# EAGLE board MainBoard (EAGLE 6.3)
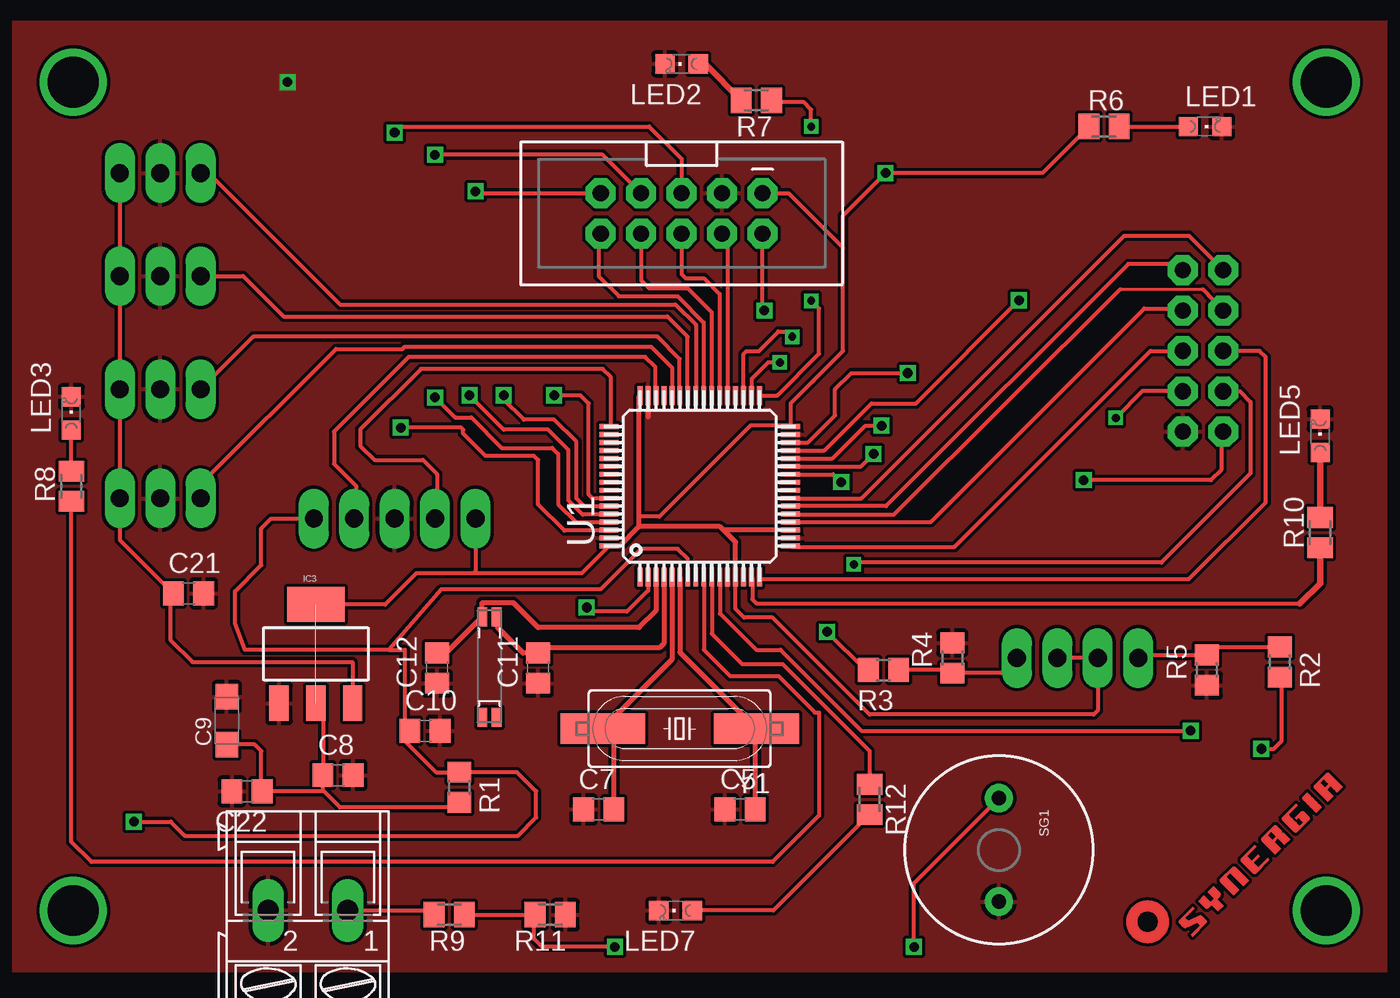
[diagram p0: board, top side]
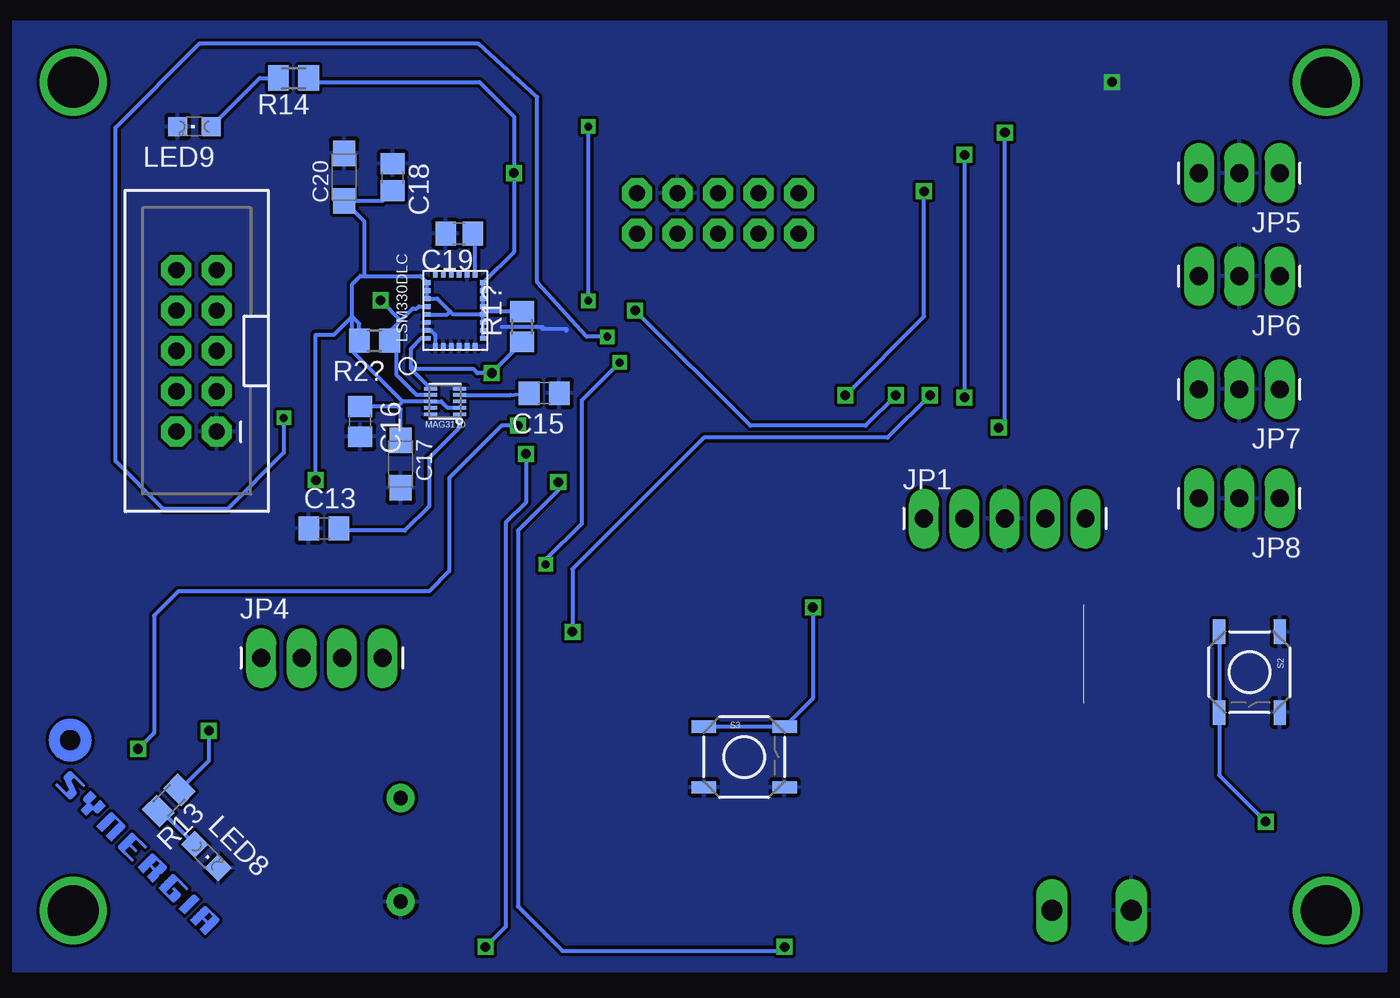
[diagram p1: board, bottom side, seen from below]

No outline drawn. Coordinates in mm, seen from the top.
Copper layers (1*16): Top 0.035mm / dielectric 1.5mm / Bottom 0.035mm
Design rules "default": minimum track width 10mil, minimum drill 24mil, track to track 8mil, track to pad 8mil, pad to pad 8mil, via to via 8mil, smd to smd 8mil, copper to edge 40mil, drill to drill 8mil, minimum pad ring 10mil, minimum via ring 8mil, stop-mask expansion 4mil, vias tented up to drill 0mil, thermal gap 10mil

## Footprints (pad centres in the part's own frame; a part is rotated, then mirrored left to right if it is on the bottom)
C0805 = smd 1.3 x 1.5: 1 -0.95,0; 2 0.95,0
SMC_A = smd 1.6 x 1.4: + -1.5,0; - 1.5,0
C0805' = smd 1.3 x 1.5: 1 -0.85,0; 2 0.85,0
SOT223 = smd 1.219 x 2.235: 1 -2.311,-3.099; 2 0,-3.099; 3 2.311,-3.099 | smd 3.6 x 2.2: 4 0,3.099
1X05_LONGPADS = drill 1.118 pad 1.88 long: 1 0,0; 2 2.54,0; 3 5.08,0; 4 7.62,0; 5 10.16,0
2X5-SHROUDED = drill 1.016 pad 1.88 octagon: 1 -1.27,5.08; 2 1.27,5.08; 3 -1.27,2.54; 4 1.27,2.54; 5 -1.27,0; 6 1.27,0; 7 -1.27,-2.54; 8 1.27,-2.54; 9 -1.27,-5.08; 10 1.27,-5.08
1X04_LONGPADS = drill 1.118 pad 1.88 long: 1 0,0; 2 2.54,0; 3 5.08,0; 4 7.62,0
1X03_LONGPADS = drill 1.118 pad 1.88 long: 1 0,0; 2 2.54,0; 3 5.08,0
CHIPLED_0805 = smd 1.2 x 1.2: A 0,-1.05; C 0,1.05
LGA_4X5X1P1_28L = smd 0.4 x 0.3: P1 -2.263,1.25; P2 -2.263,0.75; P3 -2.263,0.25; P4 -2.263,-0.25; P5 -2.263,-0.75; P6 -2.263,-1.25; P15 2.263,-1.25; P16 2.263,-0.75; P17 2.263,-0.25; P18 2.263,0.25; P19 2.263,0.75; P20 2.263,1.25 | smd 0.3 x 0.4: P7 -1.75,-1.762; P8 -1.25,-1.762; P9 -0.75,-1.762; P10 -0.25,-1.762; P11 0.25,-1.762; P12 0.75,-1.762; P13 1.25,-1.762; P14 1.75,-1.762; P21 1.75,1.762; P22 1.25,1.762; P23 0.75,1.762; P24 0.25,1.762; P25 -0.25,1.762; P26 -0.75,1.762; P27 -1.25,1.762; P28 -1.75,1.762
DFN-10 = smd 0.8 x 0.22: 1 -0.91,0.8; 2 -0.91,0.4; 3 -0.91,0; 4 -0.91,-0.4; 5 -0.91,-0.8; 6 0.91,-0.8; 7 0.91,-0.4; 8 0.91,0; 9 0.91,0.4; 10 0.91,0.8
R0805 = smd 1.3 x 1.5: 1 -0.95,0; 2 0.95,0
M0805 = smd 1.3 x 1.6: 1 -0.95,0; 2 0.95,0
TACTILE_SWITCH_SMD = smd 1.524 x 0.762: 1 -2.54,1.905; 2 2.54,1.905; 3 -2.54,-1.905; 4 2.54,-1.905
BUZZER-12MM = drill 0.9 pad 1.778: + 3.25,0; - -3.25,0
TQFP64 = smd 1.2 x 0.3: 1 -5.7,3.75; 2 -5.7,3.25; 3 -5.7,2.75; 4 -5.7,2.25; 5 -5.7,1.75; 6 -5.7,1.25; 7 -5.7,0.75; 8 -5.7,0.25; 9 -5.7,-0.25; 10 -5.7,-0.75; 11 -5.7,-1.25; 12 -5.7,-1.75; 13 -5.7,-2.25; 14 -5.7,-2.75; 15 -5.7,-3.25; 16 -5.7,-3.75; 33 5.7,-3.75; 34 5.7,-3.25; 35 5.7,-2.75; 36 5.7,-2.25; 37 5.7,-1.75; 38 5.7,-1.25; 39 5.7,-0.75; 40 5.7,-0.25; 41 5.7,0.25; 42 5.7,0.75; 43 5.7,1.25; 44 5.7,1.75; 45 5.7,2.25; 46 5.7,2.75; 47 5.7,3.25; 48 5.7,3.75 | smd 0.3 x 1.2: 17 -3.75,-5.7; 18 -3.25,-5.7; 19 -2.75,-5.7; 20 -2.25,-5.7; 21 -1.75,-5.7; 22 -1.25,-5.7; 23 -0.75,-5.7; 24 -0.25,-5.7; 25 0.25,-5.7; 26 0.75,-5.7; 27 1.25,-5.7; 28 1.75,-5.7; 29 2.25,-5.7; 30 2.75,-5.7; 31 3.25,-5.7; 32 3.75,-5.7; 49 3.75,5.7; 50 3.25,5.7; 51 2.75,5.7; 52 2.25,5.7; 53 1.75,5.7; 54 1.25,5.7; 55 0.75,5.7; 56 0.25,5.7; 57 -0.25,5.7; 58 -0.75,5.7; 59 -1.25,5.7; 60 -1.75,5.7; 61 -2.25,5.7; 62 -2.75,5.7; 63 -3.25,5.7; 64 -3.75,5.7
AK300/2 = drill 1.321 long: 1 -2.515,0; 2 2.489,0
HC49UP = smd 5.334 x 1.93: 1 -4.826,0; 2 4.826,0
CRYSTAL-32KHZ-SMD_EPSON_MC146 = smd 1.2 x 0.6: NC1 6.9,1.2; NC2 6.9,0.3; P$1 0.6,0.3; P$2 0.6,1.2

## Placement (x,y rotation side)
C5  22p  [C0805]  26.67,12.7 0 top
C7  22p  [C0805]  17.78,12.7 0 top
C8  100n  [C0805]  1.4,14.86 0 top
C9  1u  [SMC_A]  -5.59,18.29 90 top
C10  100n  [C0805]  6.86,17.65 0 top
C11  10p  [C0805]  13.97,21.59 90 top
C12  10p  [C0805]  7.62,21.59 90 top
C13  100n  [C0805]  47.75,30.35 0 bottom
C15  100n  [C0805]  33.91,38.86 180 bottom
C16  100n  [C0805]  45.47,37.08 270 bottom
C17  1uF  [SMC_A]  42.93,34.42 270 bottom
C18  100n  [C0805']  43.43,52.45 270 bottom
C19  10n  [C0805']  39.24,48.9 180 bottom
C20  10u  [SMC_A]  46.48,52.45 90 bottom
C21  [C0805]  -8,26.29 0 top
C22  [C0805]  -4.32,13.84 180 top
IC3  [SOT223]  0,22.48 0 top
JP1  [1X05_LONGPADS]  10.03,30.99 0 bottom
JP2  M05X2SHD  [2X5-SHROUDED]  22.99,50.16 270 top
JP3  M05X2SHD  [2X5-SHROUDED]  55.75,41.53 180 bottom
JP4  [1X04_LONGPADS]  51.69,22.23 0 bottom
JP5  [1X03_LONGPADS]  -12.32,52.7 180 bottom
JP6  [1X03_LONGPADS]  -12.32,46.23 180 bottom
JP7  [1X03_LONGPADS]  -12.32,39.12 180 bottom
JP8  [1X03_LONGPADS]  -12.32,32.26 180 bottom
LED1  [CHIPLED_0805]  55.88,55.63 270 top
LED2  [CHIPLED_0805]  22.99,59.56 90 top
LED3  [CHIPLED_0805]  -15.37,37.59 0 top
LED5  [CHIPLED_0805]  63.12,36.2 0 top
LED7  [CHIPLED_0805]  22.61,6.35 90 top
LED8  [CHIPLED_0805]  55.13,9.77 225 bottom
LED9  [CHIPLED_0805]  55.88,55.63 90 bottom
LSM330DLC  LSM330DLC  [LGA_4X5X1P1_28L]  39.5,44.07 90 bottom
MAG3110  MAG3110  [DFN-10]  40.13,38.35 180 bottom
R1  10k  [R0805]  9.02,14.1 270 top
R1?  4.7k  [R0805]  35.31,43.05 90 bottom
R2  510  [R0805]  60.58,21.97 270 top
R2?  4.7k  [R0805]  44.58,42.16 180 bottom
R3  510  [R0805]  35.69,21.46 180 top
R4  10k  [R0805]  40.01,22.23 90 top
R5  10k  [R0805]  56.01,21.46 90 top
R6  [M0805]  49.53,55.63 0 top
R7  [M0805]  27.69,57.28 180 top
R8  [M0805]  -15.37,33.02 90 top
R9  [M0805]  8.38,6.1 180 top
R10  [M0805]  63.12,30.1 90 top
R11  [M0805]  14.73,6.1 180 top
R12  [M0805]  34.8,13.34 270 top
R13  [M0805]  57.49,13.27 225 bottom
R14  [M0805]  49.66,58.67 180 bottom
S2  [TACTILE_SWITCH_SMD]  -10.41,21.34 270 bottom
S3  [TACTILE_SWITCH_SMD]  21.34,16 0 bottom
SG1  BUZZERPTH  [BUZZER-12MM]  42.93,10.16 270 top
U1  STM32F10XRXT6  [TQFP64]  24.13,33.02 90 top
U$1  [SYNERGIA_16MM]  53.22,2.82 45 top
U$2  [SYNERGIA_16MM]  66.52,16.12 315 bottom
X1  [AK300/2]  -0.51,6.35 180 top
Y1  8MHz  [HC49UP]  22.86,17.78 180 top
Y2  32.768kHz  [CRYSTAL-32KHZ-SMD_EPSON_MC146]  10.16,25.4 270 top

## Library data of the parts
C5 C7-C13 C15-C17 C20-C22 R1 R1? R2 R2? R3-R5 = rcl
C18 C19 R6-R14 = resistor
IC3 = SparkFun-PowerIC
JP1-JP8 = SparkFun-Connectors
LED1-LED3 LED5 LED7-LED9 = led
LSM330DLC = sensors-akc_zyr
MAG3110 = sparkfun-sensors (2)
S2 S3 = SparkFun-Electromechanical; PROD_ID: SWCH-08247
SG1 = SparkFun-Electromechanical
U1 = stm32
U$1 U$2 = synergia_logo
X1 = con-ptr500; OC_FARNELL: unknown; OC_NEWARK: unknown
Y1 Y2 = SparkFun-FreqCtrl

## Nets
3.3V: C8.1 C9.+ C16.1 C17.+ C18.2 C20.+ C22.1 IC3.2 IC3.4 JP1.1 JP2.1 JP3.2 JP4.2 JP4.3 LSM330DLC.P7 LSM330DLC.P8 LSM330DLC.P9 LSM330DLC.P10 LSM330DLC.P11 LSM330DLC.P12 LSM330DLC.P13 LSM330DLC.P14 LSM330DLC.P21 LSM330DLC.P22 LSM330DLC.P23 LSM330DLC.P25 MAG3110.2 MAG3110.8 R1.2 R1?.2 R2?.2 R6.1 R14.1 U1.13 U1.19 U1.32 U1.48 U1.64
5V: C21.1 IC3.3 JP5.1 JP6.1 JP7.1 JP8.1
A1: JP2.7 U1.61
A2: JP2.5 U1.62
A3: JP2.9 U1.58
A4: JP2.2 U1.59
A5: JP2.8 U1.39
A6: JP2.10 U1.40
A7: JP2.4 U1.37
A8: JP2.6 U1.38
BOOT0: R3.2 U1.60
BOOT1: R2.2 U1.28
BUTTON: S3.1 S3.2 U1.2
BUZZ: SG1.- U1.27
GND: C5.1 C7.1 C8.2 C9.- C10.2 C11.1 C12.1 C13.1 C15.1 C16.2 C17.- C18.1 C19.2 C20.- C21.2 C22.2 IC3.1 JP1.3 JP2.3 JP3.1 JP5.2 JP6.2 JP7.2 JP8.2 LED1.C LED2.C LED3.C LED5.C LED7.C LED8.C LED9.C LSM330DLC.P1 LSM330DLC.P2 LSM330DLC.P3 LSM330DLC.P4 LSM330DLC.P5 LSM330DLC.P6 LSM330DLC.P16 LSM330DLC.P26 LSM330DLC.P27 MAG3110.5 MAG3110.10 R4.2 R5.1 R11.1 S2.1 S2.2 S3.3 S3.4 SG1.+ U1.12 U1.18 U1.31 U1.47 U1.63 X1.2
INT_ACC: LSM330DLC.P20
INT_GYRO: LSM330DLC.P18
INT_MAG: MAG3110.9
L1: R7.1 U1.33
L2: R8.1 U1.9
L4: R10.1 U1.15
L6: R12.1 U1.10
L7: R13.1 U1.11
LIPO: R9.1 R11.2 U1.26
MISO: JP3.9 U1.22
MOSI: JP3.10 U1.23
N$1: JP4.1 R2.1 R5.2
N$2: JP4.4 R3.1 R4.1
N$3: C15.2 MAG3110.4
N$4: C13.2 MAG3110.1
N$5: C19.1 LSM330DLC.P15
N$6: LED1.A R6.2
N$7: LED2.A R7.2
N$8: LED3.A R8.2
N$10: LED5.A R10.2
N$12: LED7.A R12.2
N$13: LED8.A R13.2
N$14: LED9.A R14.2
N$19: R9.2 X1.1
NRST: C10.1 JP1.5 R1.1 S2.3 S2.4 U1.7
OSC32_IN: C12.2 U1.3 Y2.P$1
OSC32_OUT: C11.2 U1.4 Y2.P$2
OSC_IN: C7.2 U1.5 Y1.2
OSC_OUT: C5.2 U1.6 Y1.1
OUT1: JP3.3 U1.35
OUT2: JP3.4 U1.34
REG1: JP5.3 U1.41
REG2: JP6.3 U1.42
REG3: JP7.3 U1.43
REG4: JP8.3 U1.44
RX: JP3.5 U1.17
SCK: JP3.8 U1.21
SCL: LSM330DLC.P24 MAG3110.7 R2?.1 U1.29
SDA: LSM330DLC.P28 MAG3110.6 R1?.1 U1.30
SS: JP3.7 U1.20
SWCLK: JP1.2 U1.49
SWDIO: JP1.4 U1.46
TX: JP3.6 U1.16
V_BATT: U1.1

## Tracks (layer width: path | path; a pad name or v marks a point on that pad's centre or on a via)
3.3V  (via drill 0.6)  (1 unrouted)
  Top 0.254: 20.32,31.11 21.59,31.11 27.3,36.83 29.77,36.83 U1.32 29.84,36.78 29.84,38.23 31.24,39.62 31.25,39.62 33.14,41.52 33.14,48.01 | JP2.1 29.72,51.44 33.14,48.01 | 9.91,27.56 6.35,27.56 4.37,25.58 IC3.4 | 9.91,27.56 16.72,27.56 U1.64 | 0,19.18 0.13,19.3 0.08,19.3 IC3.2 0.45,18.93 C8.1 0.45,13.9 | 9.14,13.02 R1.2 8.7,12.83 1.52,12.83 0.45,13.9 | 0.45,13.9 0.39,13.84 C22.1 -3.43,13.9 -3.43,16.38 -3.83,16.79 C9.+ | JP4.3 JP4.2 49.15,18.92 48.9,18.67 34.8,18.67 28.7,24.77 26.92,24.77 26.38,25.31 U1.13 | R6.1 45.66,52.7 v35.81,52.7 33.14,50.03 33.14,48.01 | JP3.2 56.9,36.32 56.9,34.04 56.26,33.4 v48.26,33.4 | JP1.1 10.03,27.69 9.91,27.56
  Top 0.305: U1.64 19.11,29.27 20.32,30.48 | 20.32,30.48 20.32,31.11 20.32,38.66 U1.48 | U1.13 26.38,29.5 25.61,30.27 | 20.32,30.48 25.4,30.48 25.61,30.27 | U1.19 25.61,30.27
  Bottom 0.254: 39.81,44.01 40.63,44.82 LSM330DLC.P23 LSM330DLC.P22 LSM330DLC.P21 41.67,46.23 45.21,46.23 | 39.81,44.01 39.62,43.81 39.62,43.82 LSM330DLC.P10 | LSM330DLC.P25 40,43.82 39.81,44.01 | MAG3110.2 39.24,37.97 40.01,37.97 40.39,38.35 MAG3110.8 42.8,38.35 | LSM330DLC.P7 LSM330DLC.P8 LSM330DLC.P9 LSM330DLC.P10 | LSM330DLC.P10 LSM330DLC.P11 | LSM330DLC.P11 LSM330DLC.P12 LSM330DLC.P13 LSM330DLC.P14 35.81,47.74 v35.81,52.7 35.81,56.26 37.97,58.42 48.45,58.42 R14.1 | 42.8,38.35 45.97,41.53 45.97,43.69 | 45.97,43.69 45.97,45.72 45.47,46.23 45.21,46.23 | R1?.2 37.42,44 LSM330DLC.P11 | R2?.2 45.53,43.24 45.97,43.69 | v48.26,33.4 48.26,42.55 47.12,42.55 45.97,43.69 | C18.2 44.08,50.95 C20.+ 45.21,49.68 45.21,46.23 | 42.8,38.35 43.12,38.03 | 43.12,38.03 C16.1 | C17.+ 42.93,37.84 43.12,38.03
5V
  Top 0.254: IC3.3 2.31,21.95 2.29,21.97 -7.75,21.97 -9.14,23.37 -9.14,26.1 C21.1 -12.32,29.66 JP8.1 JP7.1 JP6.1 -12.32,46.48 JP5.1
A1  (via drill 0.6)
  Top 0.254: JP2.7 18.03,53.85 v7.49,53.85 | v7.49,38.61 8.76,37.34 9.78,37.34 11.68,35.43 14.86,35.43 15.24,35.05 15.24,31.88 16.35,30.77 U1.61
  Bottom 0.254: v7.49,53.85 v7.49,38.61
A2  (via drill 0.6)
  Top 0.254: U1.62 18.39,30.23 15.62,30.23 13.97,31.88 13.97,34.67 13.72,34.92 10.67,34.92 9.27,36.32 9.27,36.58 9.14,36.7 v5.33,36.7 | v4.95,55.24 5.33,55.63 20.95,55.63 22.99,53.59 JP2.5
  Bottom 0.254: v5.33,36.7 4.95,37.08 v4.95,55.24
A3  (via drill 0.6)
  Top 0.254: U1.58 18.42,32.26 17.4,32.26 17.14,32.51 17.14,38.23 16.64,38.73 v14.99,38.73 | v10.03,51.56 10.16,51.44 JP2.9
  Bottom 0.254: v14.99,38.73 10.03,43.69 v10.03,51.56
A4  (via drill 0.6)
  Top 0.254: U1.59 18.41,31.75 16.89,31.75 16.38,32.26 16.38,35.81 14.99,37.21 13.08,37.21 11.81,38.48 v11.81,38.73 | v28.19,44.07 28.07,44.2 JP2.2
  Bottom 0.254: v11.81,38.73 13.72,36.83 20.95,36.83 v28.19,44.07
A5
  Top 0.254: JP2.8 20.32,48.77 20.45,48.64 20.45,45.97 20.95,45.47 23.37,45.47 24.88,43.95 U1.39
A6
  Top 0.254: JP2.10 17.78,48.77 17.78,46.23 19.05,44.96 22.73,44.96 24.38,43.31 U1.40
A7
  Top 0.254: JP2.4 25.88,48.54 U1.37
A8
  Top 0.254: JP2.6 22.99,46.35 23.24,46.1 24.38,46.1 25.38,45.1 U1.38
BOOT0  (via drill 0.6)
  Top 0.254: U1.60 18.4,31.24 16.76,31.24 15.88,32.13 15.88,35.31 14.61,36.58 11.81,36.58 v9.65,38.73 | v32.13,23.88 34.54,21.46 R3.2
  Bottom 0.254: v9.65,38.73 12.32,36.07 23.88,36.07 32.13,27.81 v32.13,23.88
BOOT1  (via drill 0.6)
  Top 0.254: U1.28 32.48,34.77 34.54,36.83 v35.56,36.83 | v59.44,16.51 60.2,16.51 60.71,17.02 60.71,20.89 R2.2
  Bottom 0.254: v35.56,36.83 36.58,36.83 39.88,33.53 39.88,27.69 41.15,26.42 56.9,26.42 58.42,24.89 58.42,17.53 v59.44,16.51
BUTTON  (via drill 0.6)
  Top 0.254: U1.2 20.88,26.47 19.56,25.15 17.27,25.15 v17.02,25.4
  Bottom 0.254: v17.02,25.4 17.02,19.68 S3.2 S3.1
BUZZ  (via drill 0.6)
  Top 0.254: U1.27 34.27,34.27 v35.05,35.05 | v37.59,4.06 37.59,8.08 SG1.-
  Bottom 0.254: v35.05,35.05 35.05,32 36.32,30.73 36.32,5.33 v37.59,4.06
GND  (via drill 0.6)
  Top 0.305: U1.47 20.88,37.39
  Bottom 0.254: LSM330DLC.P27 41.04,42.82 40.77,42.55 40.77,41.83 LSM330DLC.P1 | 36.58,43.05 34.04,43.05 34.04,42.93 32.51,42.93 32.51,42.8
  other vias: -1.78,58.42
  pour Top: -19.05,62.23 -19.05,2.54 67.31,2.54 67.31,62.23
  pour Bottom: -19.05,62.23 67.31,62.23 67.31,2.54 -19.05,2.54
L1  (via drill 0.5)
  Top 0.254: U1.33 29,38.72 31.63,41.35 31.63,44.19 v31.14,44.68 | v31.14,55.63 31.14,56.7 30.68,57.15 28.76,57.15 R7.1
  Bottom 0.254: v31.14,44.68 v31.14,55.63
L2
  Top 0.254: U1.9 24.38,22.73 26.04,21.08 29.08,21.08 31.37,18.8 31.62,18.8 31.62,12.32 28.7,9.4 -14.1,9.4 -15.37,10.67 R8.1
L4
  Top 0.254: U1.15 27.43,27.27 27.43,25.91 27.69,25.65 61.85,25.65
  Top 0.406: R10.1 63.12,26.92 61.85,25.65
L6
  Top 0.254: U1.10 24.89,27.31 24.89,23.75 26.8,21.84 29.34,21.84 34.8,16.38 R12.1
L7  (via drill 0.6)
  Top 0.254: U1.11 25.4,27.3 25.4,25.02 27.69,22.73 29.21,22.73 34.29,17.65 v54.99,17.65
  Bottom 0.254: v54.99,17.65 54.99,15.77 R13.1
LIPO  (via drill 0.6)
  Top 0.254: R9.1 R11.2 13.72,6.03 13.72,4.57 14.22,4.06 v18.8,4.06 | U1.26 32.52,33.77 v33.02,33.27
  Bottom 0.254: v33.02,33.27 33.02,32.77 35.56,30.23 35.56,6.6 32.77,3.81 19.05,3.81 v18.8,4.06
MISO
  Top 0.254: JP3.9 54.1,46.99 51.05,46.99 35.83,31.77 U1.22
MOSI
  Top 0.254: JP3.10 54.86,48.77 50.8,48.77 34.29,32.26 29.84,32.26 U1.23
N$1
  Top 0.254: JP4.1 51.88,22.41 R5.2 56.52,22.92 R2.1
N$2
  Top 0.254: JP4.4 43.12,21.27 R4.1 39.82,21.46 R3.1
N$3
  Bottom 0.254: MAG3110.4 36.03,38.75 C15.2
N$4
  Bottom 0.254: MAG3110.1 39.22,36.72 41.15,34.8 41.15,31.75 42.67,30.23 46.67,30.23 C13.2
N$5
  Bottom 0.254: LSM330DLC.P15 38.25,48.75 C19.1
N$6
  Top 0.254: R6.2 LED1.A
N$7
  Top 0.406: LED2.A 24.45,59.56 R7.2
N$8
  Top 0.254: R8.2 LED3.A
N$9  (via drill 3.2)
  other vias: -15.24,58.42
N$10
  Top 0.406: LED5.A R10.2
N$11  (via drill 3.2)
  other vias: 63.5,58.42
N$12
  Top 0.254: R12.2 28.76,6.35 LED7.A
N$13
  Bottom 0.254: R13.2 57.96,12.6 LED8.A
N$14
  Bottom 0.254: LED9.A 51.78,58.67 R14.2
N$15  (via drill 3.2)
  other vias: 63.5,6.35
N$16  (via drill 3.2)
  other vias: -15.24,6.35
N$19
  Top 0.254: X1.1 7.18,6.35 R9.2
NRST  (via drill 0.6)
  Top 0.254: U1.7 23.38,28.44 22.73,29.08 20.45,29.08 17.91,26.54 7.87,26.54 4.57,22.73 | 4.57,22.73 -4.45,22.73 -5.08,24.38 -5.08,26.42 -3.43,28.07 -3.43,30.35 -2.79,30.99 JP1.5 | 4.57,22.73 5.59,22.73 5.59,17.4 | 5.59,17.4 5.59,17.02 7.56,15.05 R1.1 12.64,15.05 13.84,13.84 13.84,12.19 12.7,11.05 -8.23,11.05 -9.12,11.94 v-11.43,11.94 | C10.1 5.65,17.4 5.59,17.4
  Bottom 0.254: S2.4 S2.3 -8.51,14.86 v-11.43,11.94
OSC32_IN
  Top 0.305: U1.3 21.38,25.19 20.32,24.13 13.97,24.13 12.4,25.7 10.46,25.7 Y2.P$1 8.2,22.54 C12.2
OSC32_OUT
  Top 0.305: U1.4 21.88,23.15 21.59,22.86 14.29,22.86 C11.2 13.02,22.54 11.43,24.13 11.43,24.73 Y2.P$2
OSC_IN
  Top 0.305: U1.5 22.38,22.13 Y1.2 18.73,17.08 C7.2
OSC_OUT
  Top 0.305: U1.6 22.88,22.59 Y1.1 27.62,17.71 C5.2
OUT1  (via drill 0.5)
  Top 0.254: JP3.3 51.94,38.99 v50.27,37.31 | U1.35 26.88,41.33 27.06,41.51 27.84,41.51 29.08,42.74 29.61,42.74 v29.94,42.42
  Bottom 0.254: v50.27,37.31 50.27,35.13 53.81,31.59 57.84,31.59 60.84,34.59 60.84,55.56 55.58,60.83 38.03,60.83 34.34,57.48 34.34,45.86 31.24,42.42 v29.94,42.42
OUT2  (via drill 0.5)
  Top 0.254: JP3.4 58.08,38.99 58.74,38.32 58.74,33.82 53.14,28.22 33.92,28.22 v33.81,28.11 | v29.16,40.8 28.42,40.8 27.39,39.76 U1.34
  Bottom 0.254: v33.81,28.11 33.81,28.4 31.54,30.68 31.54,38.43 v29.16,40.8
REG1
  Top 0.254: U1.41 23.88,43.18 22.61,44.45 1.52,44.45 -6.6,52.58 -7.11,52.58 JP5.3
REG2
  Top 0.254: U1.42 23.37,38.73 23.37,42.42 22.1,43.69 -2.03,43.69 -4.57,46.23 JP6.3
REG3
  Top 0.254: U1.43 22.86,38.74 22.86,41.02 21.46,42.42 -3.94,42.42 JP7.3
REG4
  Top 0.254: U1.44 22.38,40.48 21.08,41.78 5.59,41.78 5.46,41.66 1.27,41.66 -7.24,33.15 JP8.3
RX
  Top 0.254: U1.17 29.89,29.21 40.13,29.21 52.45,41.53 JP3.5
SCK
  Top 0.2: 50.58,45.41 55.74,45.41
  Top 0.254: U1.21 29.86,31.24 36.32,31.24 50.58,45.41 | 55.74,45.41 JP3.8
SCL  (via drill 0.6)
  Top 0.254: U1.29 31.97,35.27 34.92,38.23 37.72,38.23 v44.2,44.7
  Bottom 0.254: MAG3110.7 41.93,38.75 43.18,40.01 43.18,43.18 | 43.18,43.18 42.93,43.43 | 42.93,43.43 42.16,44.2 41.91,44.2 41.78,44.32 LSM330DLC.P24 | v44.2,44.7 42.93,43.43 | R2?.1 43.63,42.73 43.18,43.18
SDA  (via drill 0.6)
  Top 0.254: U1.30 30.94,35.77 32.64,37.47 32.64,39.12 33.66,40.13 v37.21,40.13
  Bottom 0.254: LSM330DLC.P28 41.63,42.32 42.29,41.66 42.29,40.64 | 42.29,40.64 42.29,40.4 MAG3110.6 | 42.29,40.64 42.04,40.39 38.35,40.39 38.1,40.13 v37.21,40.13 35.31,42.04 R1?.1
SS
  Top 0.254: U1.20 38.64,30.77 52.07,44.2 54.36,44.2 JP3.7
SWCLK
  Top 0.254: U1.49 18.54,36.88 18.54,39.88 18.03,40.39 6.6,40.39 2.79,36.58 2.79,35.56 3.68,34.67 6.73,34.67 7.62,33.78 7.62,31.11 JP1.2
SWDIO
  Top 0.254: U1.46 21.34,38.76 21.34,40.51 20.7,41.15 5.84,41.15 1.14,36.45 1.14,34.42 2.54,33.02 2.54,31.11 JP1.4
TX
  Top 0.254: U1.16 28.02,27.18 54.86,27.18 59.69,32 59.69,41.15 59.31,41.53 JP3.6